# Altium PCB Multi_Board_V1.0.PcbDoc
Units mm, origin at the board's own origin, x right, y up, seen from the top; angles counter-clockwise.
Board outline 163.67 x 176.34 mm, 2 copper layers (Top Layer, Bottom Layer), stack 0.77 mm thick; 4 components, 0 nets, 12 pads, 0 vias.
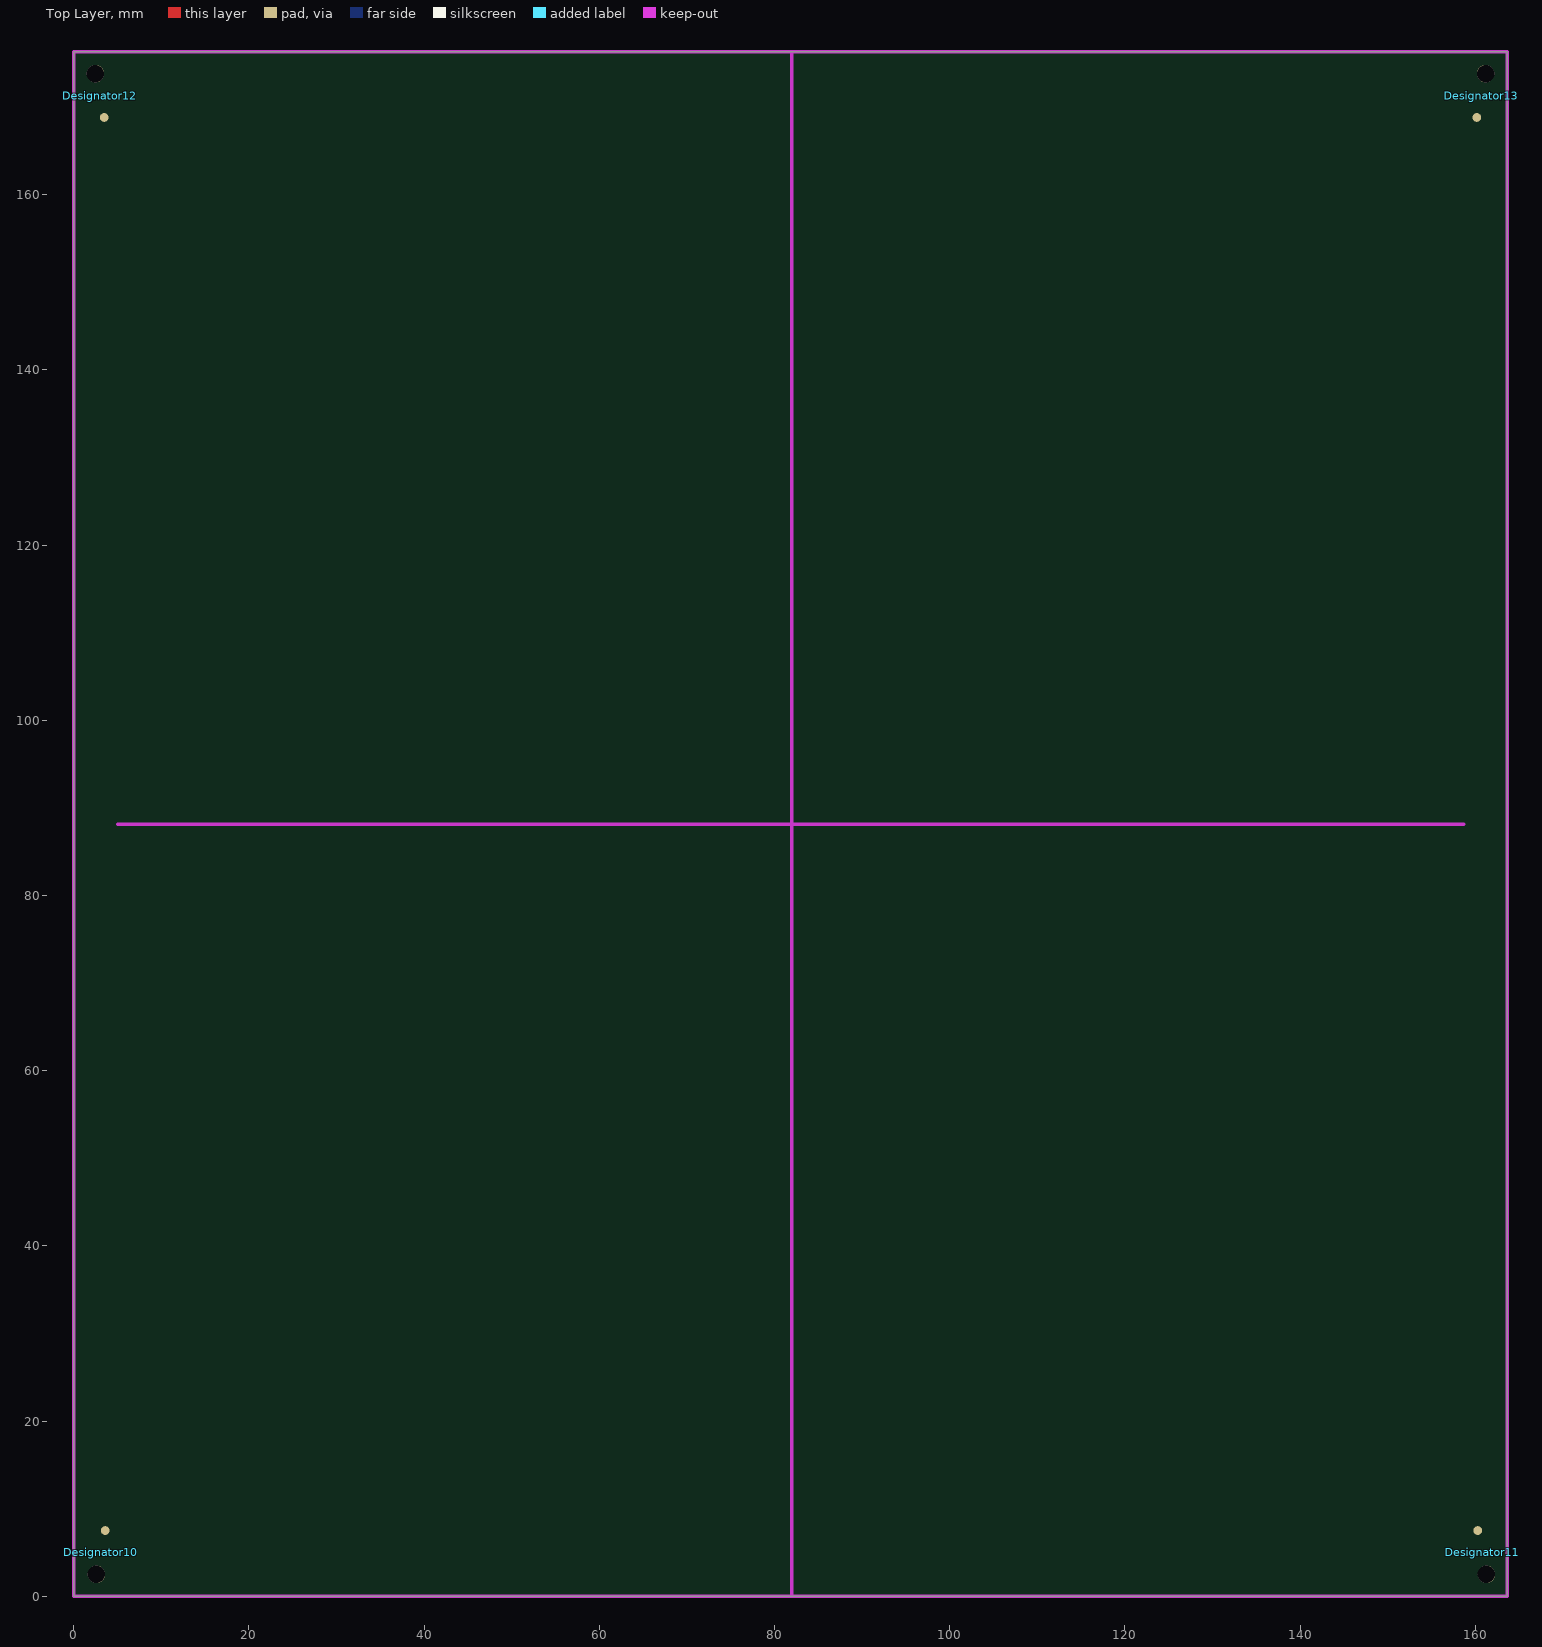
[diagram p0: Top Layer view]
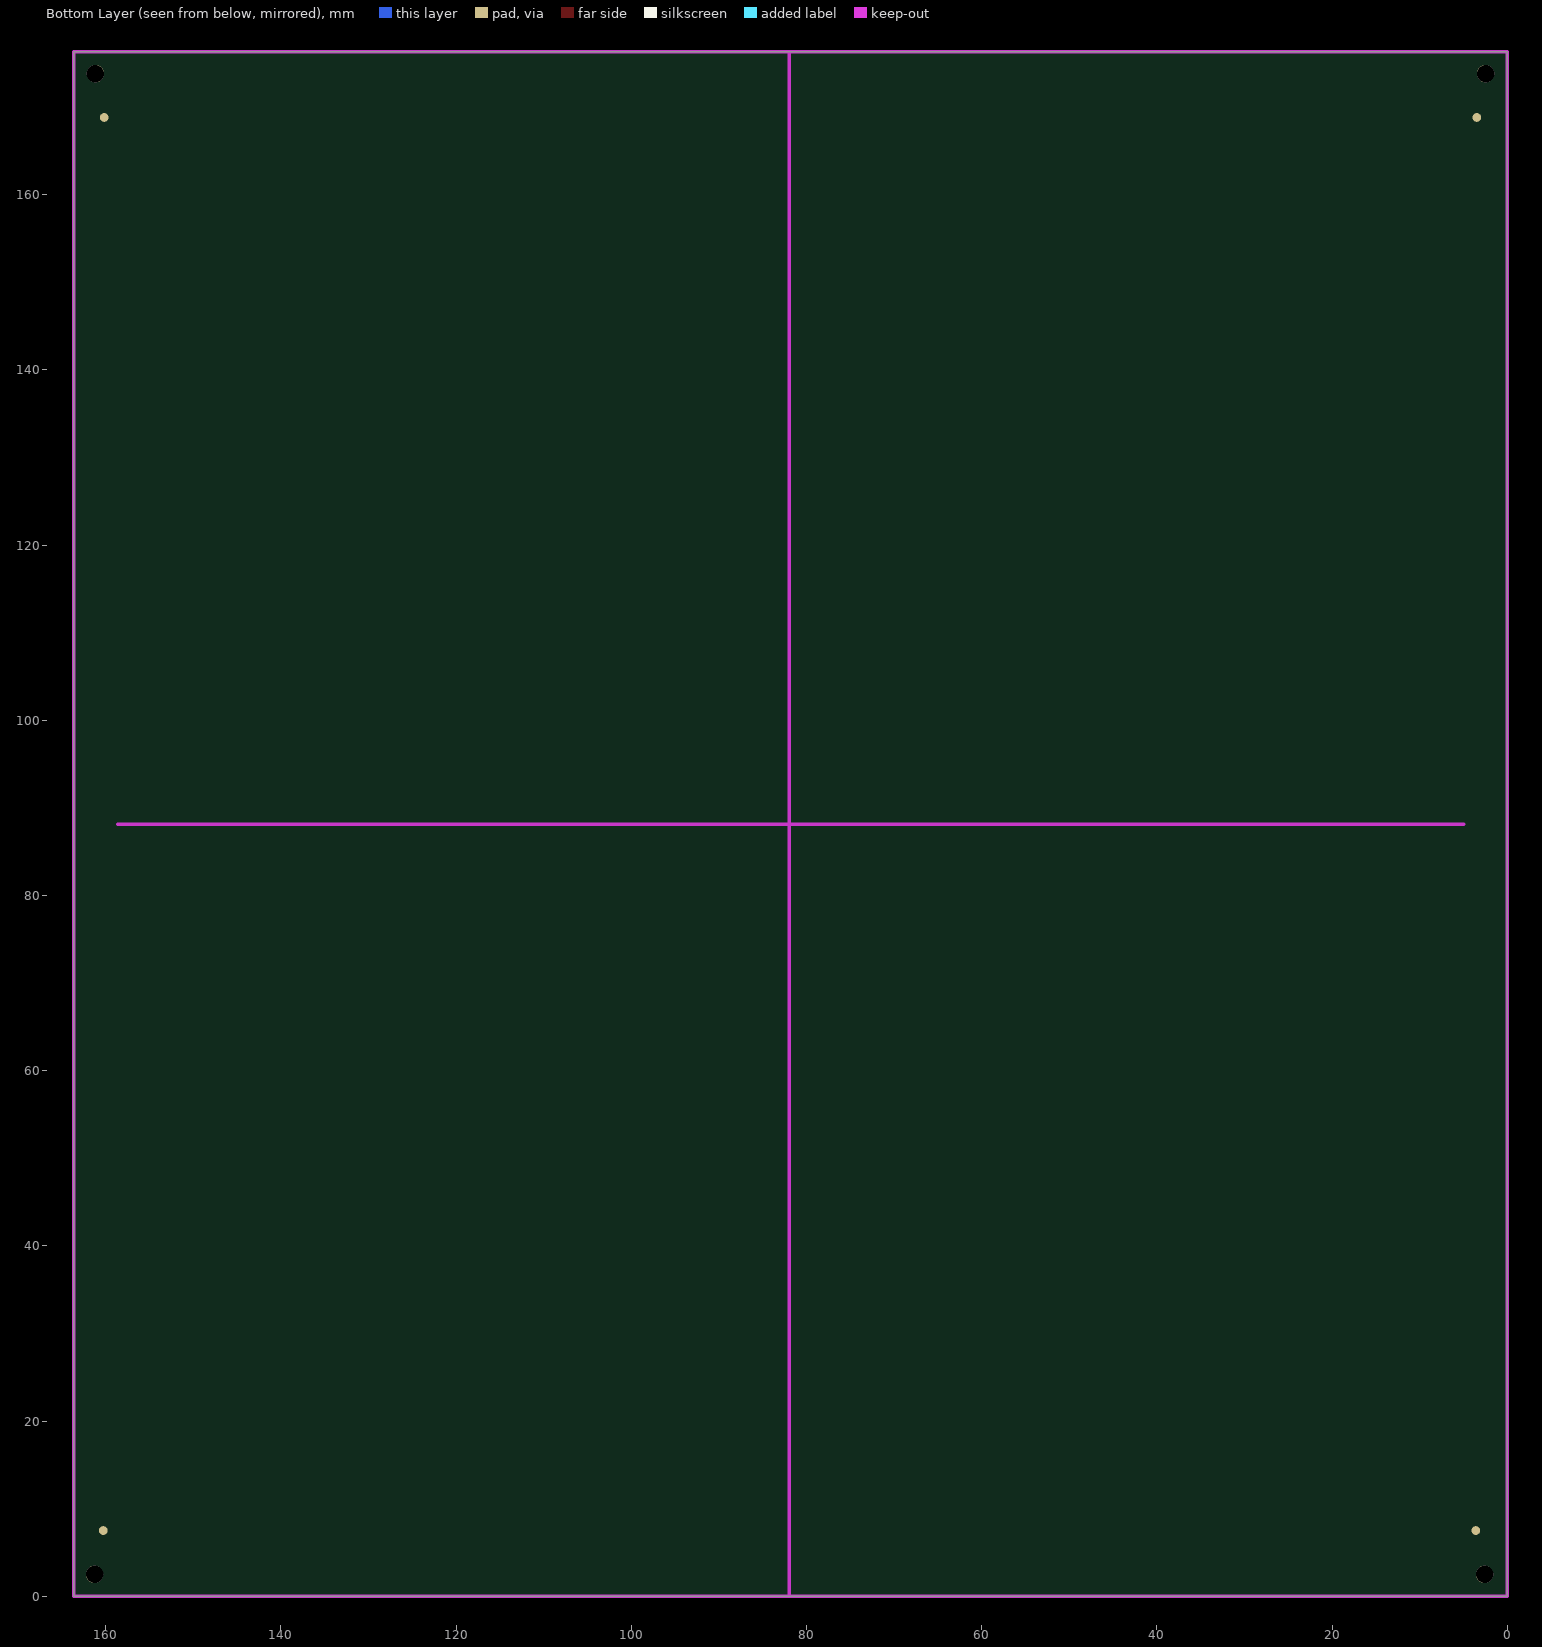
[diagram p1: Bottom Layer view, seen from below]

## Layer stack, top to bottom
Top Solder: solder mask 0.0127, Solder Resist, Dk 3.8
Top Layer: signal copper 0.035
Dielectric 1: core 0.7, FR-4, Dk 4.5
Bottom Layer: signal copper 0.035
Bottom Solder: solder mask 0.0127, Solder Resist, Dk 3.8

## Board outline
0,0 0,176.341 163.67,176.341 163.67,0

## Design rules (kind name [scope] priority, off if disabled: settings)
Clearance [All] p1: gap=0.254 ignorepadtopadclearanceinfootprint=FALSE
PolygonConnect [All] p1: connectstyle=Relief reliefconductorwidth=0.254 reliefentries=4 polygonreliefangle="90 Angle" airgapwidth=0.254
RoutingVias [All] p1: holewidth=0.711 width=1.27 viastyle="Through Hole" minholewidth=0.711 minwidth=1.27 maxholewidth=0.711 maxwidth=1.27
SolderMaskExpansion [All] p1: expansion=0.102 istentingtop=FALSE
Width [All] p1: maxlimit=0.254 minlimit=0.254 preferedwidth=0.254
30 further rules are at their usual default settings.

## Components (designator, comment, footprint, x,y, rotation, side; value= is the part's Value field where it differs from the comment)
Designator10 "Comment" FM_004#1 2.6,2.517 r0 top
Designator11 "Comment" FM_004#2 161.284,2.517 r180 top
Designator12 "Comment" FM_004#2 2.487,173.824 r0 top
Designator13 "Comment" FM_004#1 161.183,173.824 r180 top

## Footprints (in the part's own frame and the unit in brackets; to place one, negate y for a bottom-side part, rotate by r counter-clockwise, add the part's x,y. Pads: shape width x height; smd on the part's side, far side on the other; paste and mask are expansions set on the pad)
FM_004#1 [mm]
  round 2 hole 2 unplated: 1(0,0)
  round 1 smd paste+0 mask+0.5: 1(1,5)
  round 1 smd far side paste+0 mask+0.5: 1(1,5)
FM_004#2 [mm]
  round 2 hole 2 unplated: 1(0,0)
  round 1 smd paste+0 mask+0.5: 1(1,-5)
  round 1 smd far side paste+0 mask+0.5: 1(1,-5)

## Nets (pads, with @x,y where several pads share a name; then routed paths per layer and width w, separated by ;. In a path a pad name is that pad's centre, name@x,y a point inside that pad or via, vN(x,y) a via of type N, cw(c..) or ccw(c..) an arc to the next point about the centre after c; other vN are vias at no path point)
pads on no net: Designator10.1 Designator11.1 Designator12.1 Designator13.1

## Keep-outs
Keep-Out Layer:
  lines w0.381: 2.587,0 5.087,0 ; 5,88.138 81.962,88.138 ; 81.962,0 81.962,88.138 ; 81.962,176.276 81.962,88.138 ; 158.67,88.138 81.962,88.138 ; 158.797,0 161.297,0 ; 0,0 163.67,0 163.67,176.341 0,176.341 0,0

## Panel: embedded boards
"PCB_V1.0.PcbDoc" at 5,-0.254, 2 rows x 2 columns, spacing 88.647 x 77.217, rotation 0